# Altium PCB PCB3.PcbDoc (part 2 of 2)
Units mm, origin at the board's own origin, x right, y up, seen from the top; angles counter-clockwise.
Board outline 85.9 x 184.4 mm, 4 copper layers (Top Layer, GND, VCC, Bottom Layer), stack 1.615 mm thick; 137 components, 108 nets, 438 pads, 251 vias.
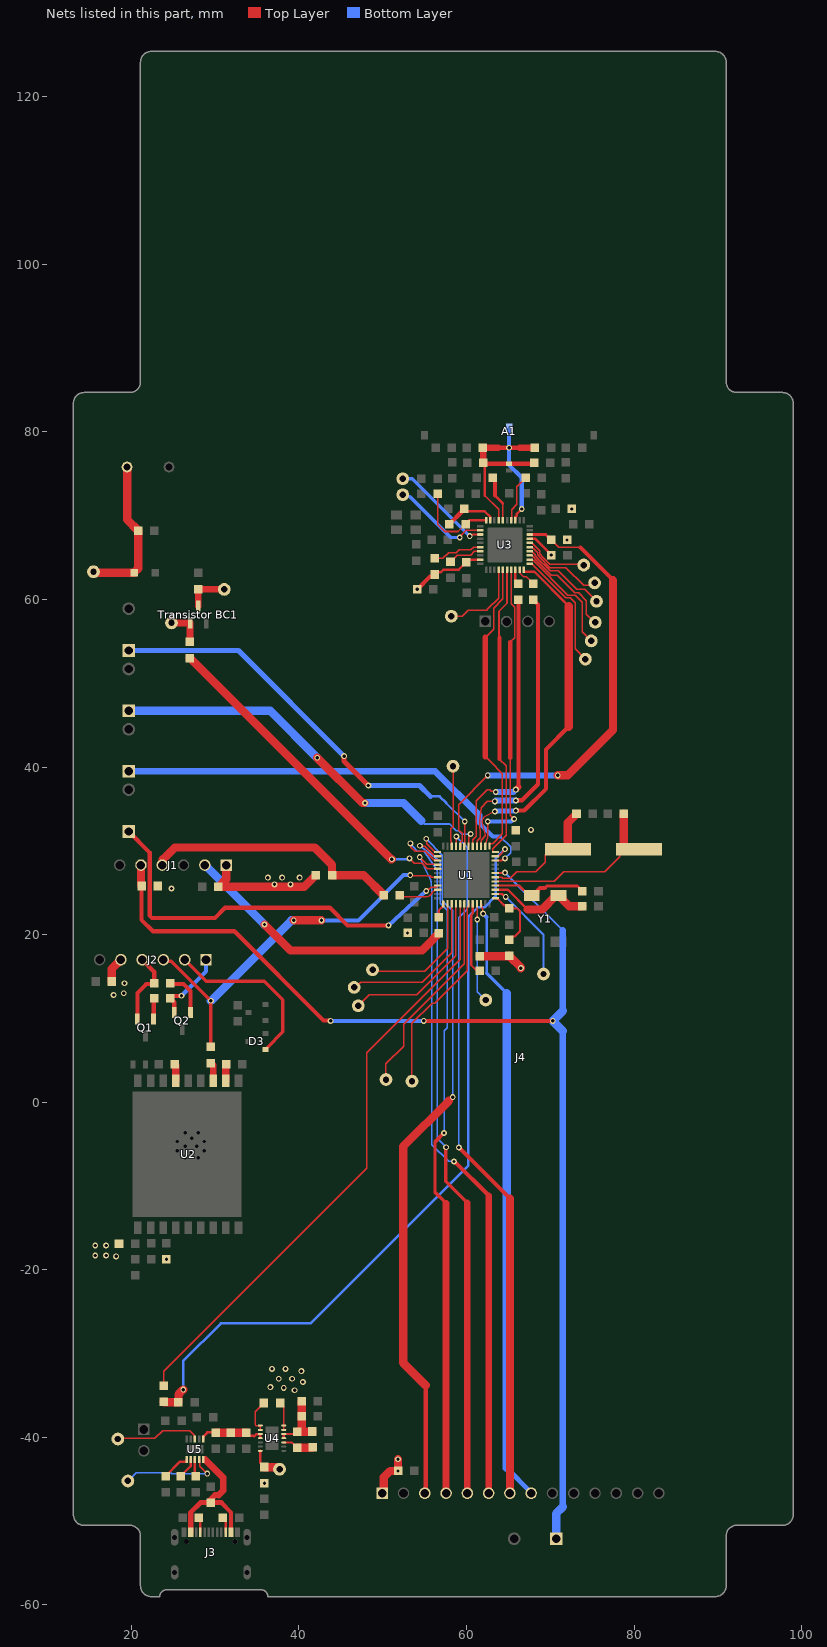
[diagram p4: the nets of this part, all layers, seen from the top]

## Via types
v1: diameter 0.7, hole 0.4, Top Layer to Bottom Layer, 186 vias
v2: diameter 0.7, hole 0.4, Top Layer to Bottom Layer, tented bottom, 64 vias
v3: diameter 0.7, hole 0.4, Top Layer to Bottom Layer, tented both sides, 1 vias

## Nets (pads, with @x,y where several pads share a name; then routed paths per layer and width w, separated by ;. In a path a pad name is that pad's centre, name@x,y a point inside that pad or via, vN(x,y) a via of type N, cw(c..) or ccw(c..) an arc to the next point about the centre after c; other vN are vias at no path point) (continued)
NetD3_1: D3.1 J2.2 | length 20.5
  Top Layer w0.4: J2.2@26.38,17 28.932,14.448 35.852,14.448 38.1,12.2 38.1,8.4 36.15,6.45 36.15,6.4 36.05,6.3 D3.1@36,6.3
NetJ1_2: J1.2 R10.2 | length 33
  Top Layer w1: v2(35.9,21.2) 39,18.1 54.693,18.1 56.028,19.435 56.028,19.466 R10.2@56.7,20.138
  Bottom Layer w1: J1.2@28.78,28.3 v2@35.89,21.19
NetJ1_4: J1.4 R8.1 R9.2 | length 30.7
  Top Layer w1: J1.4@23.7,28.3 23.771,28.371 23.771,28.971 25.2,30.4 41.9,30.4 43.962,28.338 R8.1@43.962,27.1 47.738,27.1 R9.2@50.138,24.7
NetJ2_1: J2.1 Q2.2 R15.1 | length 8.9
  Top Layer w0.5: Q2.2@25.135,10.716 25.135,11.928 R15.1@24.662,12.4 24.92,12.658 25.904,12.658 25.946,12.7 v1(26,12.7)
  Bottom Layer w0.5: v1(26,12.7) 28.92,15.62 J2.1@28.92,17
NetJ2_3: J2.3 R13.1 U1.31 | length 46.6
  Top Layer w0.15: v1(53.301,27.099) 53.4,27 55.655,27 55.805,26.85 U1.31@56.57,26.85
  Top Layer w0.4: J2.3@23.84,17 24.026,16.814 24.786,16.814 v1(29.5,12.1) R13.1@29.5,6.6
  Top Layer w1: v2(39.4,21.7) v1(42.7,21.7)
  Bottom Layer w0.5: v1(42.7,21.7) 47.1,21.7 52.499,27.099 v1(53.301,27.099)
  Bottom Layer w1: v1(29.5,12.1) 39.1,21.7 v2(39.4,21.7)
NetJ2_4: J2.4 Q1.2 R16.1 | length 9
  Top Layer w0.5: Q1.2@20.735,9.916 20.735,13.035 21.8,14.1 22.638,14.1 R16.1@22.738,14.2 22.738,15.562 J2.4@21.3,17
NetJ3_A5: J3.A5 R26.1 | length 1.8
  Top Layer w0.3: R26.1@28.062,-49.6 28.25,-49.788 J3.A5@28.25,-51.35
NetJ3_B5: J3.B5 R25.2 | length 1.9
  Top Layer w0.3: R25.2@30.938,-49.6 31.25,-49.912 J3.B5@31.25,-51.35
NetJ4_3: J4.3 U1.25 | length 85.3
  Top Layer w0.15: v1(55.2,31.438) 55.257,31.38 55.257,30.863 56.27,29.85 U1.25@56.55,29.85 U1.25@56.57,29.85 ; 57.9,0.156 58.344,0.6 v1(58.375,0.6)
  Top Layer w0.5: J4.3@55.15,-46.665 55.15,-33.8
  Top Layer w1: 55.15,-33.8 52.45,-31.1 52.45,-5.294 57.9,0.156
  Bottom Layer w0.15: v1(55.2,31.438) 57.14,29.498 57.14,24.06 58.375,22.825 v1(58.375,0.6)
NetJ4_4: J4.4 U1.26 | length 82.6
  Top Layer w0.15: v1(54.451,30.607) 54.49,30.568 55.026,30.568 56.184,29.41 56.51,29.41 U1.26@56.57,29.35
  Top Layer w0.4: v1(57.325,-3.675) 56.25,-4.75 56.25,-10.75 57.57,-12.07
  Top Layer w0.8: J4.4@57.57,-46.665 57.57,-12.07
  Bottom Layer w0.15: v1(54.451,30.607) 54.969,30.204 56.782,28.818 56.87,28.73 56.87,23.73 57.7,22.9 57.7,8.874 57.325,8.499 v1(57.325,-3.675)
NetJ4_5: J4.5 U1.27 | length 85
  Top Layer w0.15: v1(53.316,30.884) 53.372,30.828 53.372,30.428 53.875,29.925 55.075,29.925 56.09,28.91 56.51,28.91 U1.27@56.57,28.85
  Top Layer w0.4: v1(57.575,-5.375) 57.525,-5.425 57.525,-9.43 60.11,-12.015
  Top Layer w0.8: J4.5@60.11,-46.665 60.11,-12.015
  Bottom Layer w0.15: v1(53.316,30.884) 54.067,30.01 54.107,29.97 54.511,29.919 cw(c54.425,29.25) 54.513,29.919 54.945,29.863 54.997,29.81 56.5,27.7 56.5,-3.875 56.5,-4.3 v1(57.575,-5.375)
NetJ4_6: J4.6 U1.28 | length 81.9
  Top Layer w0.15: v1(54.425,29.25) 55.27,28.405 55.786,28.405 55.822,28.403 56.21,28.375 U1.28@56.57,28.35 ; v1(58.525,-7.075) v1@58.585,-7.075
  Top Layer w0.5: v1@58.585,-7.075 62.66,-11.15
  Top Layer w0.8: J4.6@62.66,-46.6 62.66,-11.15
  Bottom Layer w0.15: v1(54.425,29.25) 54.98,28.123 cw(c54.375,27.825) 54.985,28.115 55.71,26.59 cw(c55.1,26.3) 55.716,26.576 cw(c55.1,26.3) 55.775,26.302 55.872,25.263 cw(c55.2,25.2) 55.875,25.199 55.875,-5.075 57.875,-7.075 v1(58.525,-7.075)
NetJ4_7: J4.7 U1.21 | length 83
  Top Layer w0.15: U1.21@58.75,30.53 58.775,30.555 58.775,31.675 v1(58.8,31.7)
  Top Layer w0.5: v1(59.1,-5.4) 65.2,-11.5
  Top Layer w1: J4.7@65.2,-46.6 65.2,-11.5
  Bottom Layer w0.15: v1(58.8,31.7) 60.1,30.4 60.1,23 59.1,22 v1(59.1,-5.4)
NetJ4_8: J4.8 U1.46 | length 72.8
  Top Layer w0.15: U1.46@61.75,23.67 61.81,23.61 61.81,23.19 61.925,23.075 61.925,22.575 v1(62,22.5)
  Bottom Layer w0.15: v1@62,22.487 v1(62,22.5)
  Bottom Layer w0.3: 62.4,15.4 62.4,22.087
  Bottom Layer w0.4: 62.4,15.4 64.8,13
  Bottom Layer w0.5: v1@62,22.487 62.4,22.087
  Bottom Layer w0.6: 64.8,-43.66 J4.8@67.74,-46.6
  Bottom Layer w1: 64.8,-43.66 64.8,13
NetL3_1: L3.1 U4.8 U4.9 | length 4.2
  Top Layer w0.15: U4.9@35.4,-39.1 U4.8@35.4,-38.6 34.888,-38.6 34.8,-38.512 34.8,-36.938 L3.1@35.838,-35.9
NetL3_2: L3.2 U4.6 U4.7 | length 3.4
  Top Layer w0.15: L3.2@37.762,-35.9 38.195,-36.333 38.195,-37.443 38.2,-37.448 U4.7@38.2,-38.6 U4.6@38.2,-39.1
NetP1_1: P1.1 U1.38 | length 15.4
  Top Layer w0.15: P1.1@48.8,15.8 48.944,15.656 55.056,15.656 57.75,18.35 U1.38@57.75,23.67
NetP2_1: P2.1 U1.45 | length 11.9
  Top Layer w0.15: U1.45@61.25,23.67 61.275,23.645 v1@61.275,21.8
  Bottom Layer w0.15: v1(61.3,21.8) 61.3,13.2 P2.1@62.3,12.2
NetP3_1: P3.1 U1.39 | length 19.2
  Top Layer w0.15: P3.1@46.6,13.7 46.743,13.7 47.369,14.327 54.727,14.327 58.25,17.85 U1.39@58.25,23.67
NetP4_1: P4.1 U1.40 | length 20.3
  Top Layer w0.15: P4.1@47.1,11.5 48.4,12.8 54.1,12.8 58.75,17.45 U1.40@58.75,23.67
NetP5_1: P5.1 R5.1 U4.14 | length 4.1
  Top Layer w0.25: U4.14@35.4,-41.6 35.4,-43.038 R5.1@35.9,-43.538
  Top Layer w1: R5.1@35.9,-43.538 35.908,-43.546 37.304,-43.546 37.558,-43.8 P5.1@37.7,-43.8
NetP6_1: P6.1 U1.42 | length 24.8
  Top Layer w0.15: P6.1@50.4,2.7 50.4,4.6 52.5,6.7 52.5,9.3 59.75,16.55 U1.42@59.75,23.67
NetP7_1: P7.1 U1.43 | length 24.1
  Top Layer w0.15: P7.1@53.5,2.5 53.5,9.4 55.936,11.836 56.236,11.836 60.1,15.7 60.1,23.222 60.188,23.31 60.19,23.31 60.25,23.37 U1.43@60.25,23.67
NetP8_1: P8.1 U1.2 | length 12.5
  Top Layer w0.25: U1.2@63.43,24.85 64.24,24.85 64.59,24.5 v1(64.7,24.5)
  Bottom Layer w0.25: v1(64.7,24.5) 69.2,20 P8.1@69.2,15.3
NetP9_1: P9.1 U3.36 | length 7.8
  Top Layer w0.15: U3.36@67.55,66.75 67.8,66.75 67.955,66.595 67.987,66.595 68.768,65.814 68.768,65.46 68.955,65.272 68.955,65.187 69.942,64.2 73.9,64.2 P9.1@74,64.1
NetP10_1: P10.1 U3.35 | length 10
  Top Layer w0.15: U3.35@67.55,66.25 67.8,66.25 67.955,66.095 67.987,66.095 68.498,65.584 68.498,65.348 68.685,65.161 68.685,65.075 69.96,63.8 71.882,63.8 74.007,61.675 74.525,61.675 74.562,61.712 75.037,61.712 P10.1@75.3,61.975
  Bottom Layer w0.15: P10.1@75.25,61.925 P10.1@75.3,61.975
NetP11_1: P11.1 U3.33 | length 12.1
  Top Layer w0.15: U3.33@67.55,65.25 67.8,65.25 67.955,65.095 67.987,65.095 68.145,64.937 68.145,64.852 70.122,62.875 70.825,62.875 72.93,60.77 73.405,60.77 74.325,59.85 74.325,58.25 75.3,57.275 P11.1@75.375,57.275
NetP12_1: P12.1 U3.34 | length 10.6
  Top Layer w0.15: U3.34@67.55,65.75 67.8,65.75 67.955,65.595 67.987,65.595 68.228,65.354 68.228,65.236 68.415,65.049 68.415,64.964 69.979,63.4 70.95,63.4 73.15,61.2 74.1,61.2 P12.1@75.525,59.775
NetP13_1: P13.1 U3.32 | length 13.4
  Top Layer w0.15: U3.32@67.55,64.75 67.8,64.75 67.955,64.595 68.02,64.595 72.115,60.5 72.975,60.5 73.825,59.65 73.825,56.125 P13.1@74.9,55.05
NetP14_1: P14.1 U3.31 | length 14.6
  Top Layer w0.15: U3.31@67.55,64.25 67.8,64.25 71.85,60.2 72.4,60.2 72.975,59.625 72.975,54.1 P14.1@74.2,52.875
NetP15_1: P15.1 U3.24 | length 9.9
  Top Layer w0.15: P15.1@58.2,58 59.5,58 60.212,58.712 62.187,58.712 62.412,58.712 62.571,58.871 63.85,60.15
  Top Layer w0.2: 63.85,60.15 U3.24@63.85,63.55
NetP16_1: P16.1 U3.12 | length 11.8
  Top Layer w0.2: v1(59.2,67.4) 59.2,67.5 59.95,68.25 U3.12@61.65,68.25
  Bottom Layer w0.4: P16.1@52.4,72.5 52.615,72.285 53.215,72.285 58.1,67.4 v1(59.2,67.4)
NetP17_1: P17.1 U3.13 | length 12.2
  Top Layer w0.2: v1(60.4,67.55) 60.535,67.55 60.735,67.75 U3.13@61.65,67.75
  Bottom Layer w0.4: P17.1@52.4,74.4 53.55,74.4 v1(60.4,67.55)
NetP18_1: P18.1 U5.9 | length 12
  Top Layer w0.15: U5.9@28.1,-42.625 28.175,-42.7 28.175,-43.421 v1(29.077,-44.323)
  Bottom Layer w0.15: P18.1@19.6,-45.2 20.6,-44.2 24.703,-44.2 24.826,-44.323 v1(29.077,-44.323)
NetP19_1: P19.1 U5.3 | length 10.2
  Top Layer w0.15: P19.1@18.4,-40.2 18.487,-40.113 22.818,-40.113 23.73,-39.2 27,-39.2 27.525,-39.725 27.525,-40.1 U5.3@27.6,-40.175
NetP20_1: P20.1 U1.22 | length 9.7
  Top Layer w0.15: U1.22@58.25,30.53 58.19,30.59 58.19,31.155 58.125,31.22 58.125,32.62 58.4,32.895 P20.1@58.4,40.1
NetQ1_1: Q1.1 R15.2 | length 2.5
  Top Layer w0.5: Q1.1@22.665,9.916 22.695,9.945 22.695,12.357 R15.2@22.738,12.4
NetQ2_1: Q2.1 R16.2 | length 5.3
  Top Layer w0.5: R16.2@24.662,14.2 24.762,14.1 26.23,14.1 27.065,13.265 Q2.1@27.065,10.716
NetR3_2: R3.2 U1.44 | length 8.7
  Top Layer w0.25: U1.44@60.75,23.67 60.75,22.517 60.575,22.342 60.575,16.363 61.238,15.7 R3.2@61.6,15.7
NetR6_1: R6.1 R7.2 U1.11 | length 92.2
  Top Layer w0.15: U1.11@63.43,29.35 63.49,29.41 63.91,29.41 64.6,30.1 v1(64.6,30.2)
  Top Layer w1: R7.2@23.9,-35.762 23.938,-35.8 R6.1@25.638,-35.8 25.646,-35.792 25.646,-34.854 v1(26.2,-34.3)
  Bottom Layer w0.3: v1(26.2,-34.3) 26.2,-30.9 30.7,-26.4 41.4,-26.4 60.2,-7.6 60.2,22.1 61.35,23.25 62.15,23.25 63.495,24.595 63.495,29.095 v1(64.6,30.2)
NetR7_1: R7.1 U1.41 | length 72.2
  Top Layer w0.15: R7.1@23.9,-33.838 23.9,-32.1 48.1,-7.9 48.1,5.9 59.25,17.05 U1.41@59.25,23.67
NetR9_1: R9.1 U1.34 | length 4.9
  Top Layer w0.15: R9.1@52.062,24.7 52.495,24.541 54.389,24.541 55.207,24.525 55.209,24.525 ccw(c55.221,25.212) 55.759,24.784 55.94,25.012 55.94,25.046 56.074,25.18 56.21,25.29 U1.34@56.57,25.35
NetR10_1: R10.1 U1.37 | length 1.9
  Top Layer w0.25: R10.1@56.7,22.062 56.7,22.9 57.16,23.36 57.24,23.36 57.25,23.37 U1.37@57.25,23.67
NetR13_2: R13.2 U2.12 | length 2.3
  Top Layer w0.8: R13.2@29.5,4.675 29.8,4.375 U2.12@29.8,2.54
NetR14_2: R14.2 U2.11 | length 2
  Top Layer w0.9: U2.11@31.3,2.54 31.3,4.462 R14.2@31.338,4.5
NetR21_1: R21.1 U1.20 U3.38 | length 57.4
  Top Layer w0.15: U1.20@59.25,30.53 59.31,30.59 59.31,31.055 59.475,31.22 59.475,32.07 59.1,32.445 59.1,35.438 59.1,35.5 v1(62.547,39) ; R21.1@70.1,67.1 71,66.2 73.6,66.2
  Top Layer w0.3: U3.38@67.55,67.75 69.45,67.75 R21.1@70.1,67.1
  Top Layer w0.5: 73.6,66.2 77.5,62.3
  Top Layer w1: v1(70.9,39) 72.087,39 77.5,44.413 77.5,62.3
  Bottom Layer w0.7: v1(62.547,39) v1(70.9,39)
NetR23_1: R23.1 U3.29 | length 2.6
  Top Layer w0.2: U3.29@66.35,63.55 66.35,63.162 66.821,62.691 67.171,62.691 R23.1@68,61.862
NetR23_2: R23.2 U1.16 | length 35
  Top Layer w0.15: U1.16@61.25,30.53 61.31,30.59 61.31,31.21 61.656,31.556 61.656,31.68 61.573,33.454 cw(c62.547,33.5) 61.578,33.605 61.744,35.144 62.5,35.9 v1(63.4,35.9)
  Top Layer w0.5: v1(65.9,36) 65.938,36.038 66.638,36.038 68.55,37.95 68.55,59.388 R23.2@68,59.938
  Bottom Layer w0.7: v1(63.4,35.9) 63.5,36 v1(65.9,36)
NetR24_1: R24.1 U3.28 | length 1.8
  Top Layer w0.3: U3.28@65.85,63.55 65.85,62.212 R24.1@66.2,61.862
NetR24_2: R24.2 U1.17 | length 33.9
  Top Layer w0.15: U1.17@60.75,30.53 60.75,31.295 61.2,31.745 61.2,36 62.5,37.3 62.778,37.3 62.951,37.127 63.4,37.127 v1(63.505,37.022)
  Top Layer w0.5: 66.2,37.6 R24.2@66.2,59.938
  Top Layer w0.7: v1(65.9,37.3) 66.2,37.6
  Bottom Layer w0.7: v1(63.505,37.022) 65.622,37.022 v1(65.9,37.3)
NetR27_1: R27.1 R28.2 U4.3 | length 3.7
  Top Layer w0.25: U4.3@38.2,-40.6 39.138,-40.6 R28.2@39.8,-41.262
  Top Layer w1: R28.2@39.8,-41.262 41.575,-41.262 R27.1@41.638,-41.2
NetR29_1: R29.1 U5.8 | length 2.1
  Top Layer w0.3: U5.8@27.6,-42.625 27.6,-44.538 R29.1@27.7,-44.638
NetR30_1: R30.1 U5.7 | length 2.5
  Top Layer w0.3: R30.1@25.9,-44.638 27.1,-43.438 U5.7@27.1,-42.625
NetR31_2: R31.2 U5.6 | length 3.5
  Top Layer w0.3: R31.2@24.1,-44.638 25.838,-42.9 26.6,-42.9 U5.6@26.6,-42.625
NetR33_1: "Transistor BC1.3" R33.1 TP2.1 | length 5.1
  Top Layer w0.8: 28,59.216 R33.1@28,61.238 28.019,61.219 31.081,61.219 TP2.1@31.1,61.2
NetR34_1: R34.1 U1.29 | length 40.1
  Top Layer w0.15: v1(53.2,29.1) 53.8,28.5 54.7,28.5 55.35,27.85 U1.29@56.57,27.85
  Top Layer w1: R34.1@27,53 51,29 v1(51.1,29)
  Bottom Layer w0.3: v1(51.1,29) 52.992,29 53.092,29.1 v1(53.2,29.1)
NetR34_2: "Transistor BC1.1" R34.2 TP3.1 | length 4.5
  Top Layer w0.8: TP3.1@24.8,57.2 24.808,57.192 27.027,57.192 27.035,57.184 27.017,57.167 27.017,54.942 R34.2@27,54.925
NetR35_2: R35.2 U2.15 | length 2
  Top Layer w0.9: R35.2@25.2,4.5 25.3,4.4 U2.15@25.3,2.54
NetR36_2: R36.2 U3.16 | length 6
  Top Layer w0.15: R36.2@56.2,64.9 57.173,64.9 57.863,65.59 58.808,65.59 59.118,65.9 60.5,65.9 60.85,66.25 U3.16@61.65,66.25
NetR37_2: R37.2 U3.17 | length 4.1
  Top Layer w0.15: R37.2@58.1,64.5 58.9,65.3 60.5,65.3 60.95,65.75 U3.17@61.65,65.75
NetS2_1: S2.1 U1.33 | length 48.8
  Top Layer w0.15: v1(55.2,25.2) 55.78,25.68 56.456,25.68 56.518,25.742 56.541,25.79 U1.33@56.57,25.85
  Top Layer w0.5: S2.1@19.7,32.3 22.2,29.8 22.2,28.752 22.215,28.737 22.215,27.863 22.2,27.848 22.2,22.293 22.493,22 30,22 31.2,23.2 43.7,23.2 45.8,21.1 v1(50.7,21.1)
  Bottom Layer w0.5: v1(50.7,21.1) v1(55.2,25.2)
NetS3_1: S3.1 U1.10 | length 52.8
  Top Layer w0.25: U1.10@63.43,28.85 63.44,28.86 64.238,28.86 64.478,29.1 v1(64.6,29.1)
  Bottom Layer w0.15: 64,31.7 64.055,31.7 65.275,30.48 65.275,29.775 v1(64.6,29.1)
  Bottom Layer w0.5: 61.5,33.5 61.5,33.345 63.145,31.7 64,31.7
  Bottom Layer w0.8: S3.1@19.7,39.5 56.255,39.5 61.5,34.255 61.5,33.5
NetS4_1: S4.1 U1.18 | length 48.4
  Top Layer w0.15: U1.18@60.25,30.53 60.25,31.601 60.5,31.851 v1(60.5,32)
  Top Layer w1: v1(42.2,41.1) 47.6,35.7 v1@47.8,35.7
  Bottom Layer w0.15: 58.8,32.4 59.1,32.4 59.5,32 v1(60.5,32)
  Bottom Layer w0.2: 54.6,33.6 55,33.2 58,33.2 58.8,32.4
  Bottom Layer w1: S4.1@19.7,46.7 36.6,46.7 v1(42.2,41.1) ; v1(47.9,35.7) 52.5,35.7 54.6,33.6
NetS5_1: S5.1 U1.19 | length 51.9
  Top Layer w0.15: U1.19@59.75,30.53 59.775,30.555 59.775,33.475 v1(59.8,33.5)
  Top Layer w0.6: v1(45.4,41.3) 45.4,40.7 v1(48.3,37.8)
  Bottom Layer w0.15: 57.6,35.7 v1(59.8,33.5)
  Bottom Layer w0.3: 55.7,36.5 56.8,36.5 57.6,35.7
  Bottom Layer w0.6: S5.1@19.7,53.9 32.8,53.9 v1(45.4,41.3) ; v1(48.3,37.8) 54.4,37.8 55.7,36.5
NetU1_12: U1.12 U3.26 | length 35.4
  Top Layer w0.15: U1.12@63.43,29.85 63.218,29.85 63.158,29.91 63.158,30.122 63.142,30.138 63.142,30.262 63.84,30.96 64.757,31.877 64.757,37.686 64.757,40.129 63.93,40.956
  Top Layer w0.2: 63.93,55.43 63.885,55.475 63.885,58.585 64.85,59.55 U3.26@64.85,63.55
  Top Layer w0.5: 63.93,40.956 63.93,55.43
NetU1_13: U1.13 U3.25 | length 35.6
  Top Layer w0.15: 62.25,41.275 62.901,40.624 64.3,39.225 64.3,32.022 63.134,30.856 62.81,30.856 62.75,30.796 U1.13@62.75,30.53 ; 62.25,55.45 63.239,56.439 63.239,58.946 64.35,60.057
  Top Layer w0.2: 64.35,60.057 U3.25@64.35,63.55
  Top Layer w0.7: 62.25,41.275 62.25,55.45
NetU1_14: U1.14 U3.27 | length 36.6
  Top Layer w0.15: U1.14@62.25,30.53 62.31,30.89 62.526,31.662 v1(62.547,33.5) ; 65.225,41.075 65.225,34.244 65.669,33.8 v1(65.7,33.8) ; 65.225,54.925 65.755,55.455 65.755,59.091 65.35,59.496 U3.27@65.35,63.55
  Top Layer w0.5: 65.225,41.075 65.225,54.925
  Bottom Layer w0.5: v1(62.547,33.5) 65.346,33.5 65.646,33.8 v1(65.7,33.8)
NetU1_15: U1.15 U3.30 | length 42.7
  Top Layer w0.15: U1.15@61.75,30.53 61.81,30.59 61.75,30.65 61.75,31.268 62.256,31.774 62.256,31.898 61.893,33.334 cw(c62.547,33.5) 62.237,34.1 v1(63.4,34.7) ; U3.30@66.85,63.55 66.85,63.375 U3.30@66.925,63.3
  Top Layer w0.3: U3.30@66.925,63.3 68.1,63.3 72.2,59.2
  Top Layer w0.5: v1(65.9,34.8) 66.904,34.8 69.5,37.396 69.5,42.1 72.2,44.8
  Top Layer w1: 72.2,44.8 72.2,59.2
  Bottom Layer w0.15: v1(63.4,34.7) v1@63.45,34.75 ; v1@65.85,34.75 v1(65.9,34.8)
  Bottom Layer w0.6: v1@63.45,34.75 v1@65.85,34.75
NRST: J1.5 R32.1 S1.1 U1.7 | length 145.5
  Top Layer w0.25: U1.7@63.43,27.35 63.44,27.36 64.56,27.36 v1(64.6,27.4)
  Top Layer w0.5: R32.1@21.238,25.8 21.238,21.762 22.6,20.4 32.3,20.4 42.962,9.738 43.762,9.738 v1(43.8,9.7) ; v1(54.9,9.7) v1(70.3,9.7)
  Top Layer w1: J1.5@21.16,28.3 21.16,25.878 R32.1@21.238,25.8
  Bottom Layer w0.25: v1(64.6,27.4) 71.5,20.5
  Bottom Layer w0.5: v1(43.8,9.7) v1(54.9,9.7)
  Bottom Layer w0.8: 71.5,-48.298 71.5,8.5 ; 71.5,10.9 71.5,20.5
  Bottom Layer w1: S1.1@70.7,-52.1 70.7,-49.098 71.5,-48.298 ; 71.5,8.5 v1(70.3,9.7) 71.5,10.9
PC14-OSC32_IN: C1.2 U1.3 Y1.1 | length 12.8
  Top Layer w0.15: Y1.1@70.7,24.65 Y1.1@71,24.65
  Top Layer w0.25: U1.3@63.43,25.35 64.95,25.35
  Top Layer w0.3: 64.95,25.35 67.3,23
  Top Layer w1: 67.3,23 69.05,23 Y1.1@70.7,24.65 ; Y1.1@71,24.65 71.3,24.65 71.45,24.5 71.45,24.2 72.254,23.396 C1.2@73.838,23.396
PC15-OSC32_OUT: C2.2 U1.4 Y1.4 | length 11.8
  Top Layer w0.15: Y1.4@67.5,24.65 Y1.4@67.8,24.65
  Top Layer w0.25: U1.4@63.43,25.85 66.3,25.85
  Top Layer w0.3: 66.3,25.85 Y1.4@67.5,24.65 ; 69.35,25.55 69.6,25.8 73.234,25.8 C2.2@73.838,25.196
  Top Layer w0.5: Y1.4@67.8,24.65 68.1,24.65 68.5,25.05 68.5,25.257 68.793,25.55 69.35,25.55
PH0-OSC_IN: C8.2 U1.5 Y2.1 | length 23.2
  Top Layer w0.15: U1.5@63.43,26.35 70.47,26.35 71.62,27.5 76.5,27.5 78.313,29.313 78.313,29.525 78.988,30.2 Y2.1@79.012,30.2
  Top Layer w1: C8.2@78.762,34.404 78.762,30.45 79.012,30.2 Y2.1@80.6,30.2
PH1-OSC_OUT: C9.2 U1.6 Y2.2 | length 15.3
  Top Layer w0.15: U1.6@63.43,26.85 64.195,26.85 64.32,26.725 65.225,26.725 66,27.5 68.3,27.5 69.425,28.625 69.425,29.525 70.1,30.2 Y2.2@72.1,30.2
  Top Layer w1: Y2.2@72.1,30.2 72.1,33.359 C9.2@73.138,34.396
RX: C15.1 R17.2 U3.10 | length 10.4
  Top Layer w0.2: C15.1@56.562,72.596 56.562,68.938 57.4,68.1 59,68.1 R17.2@59.9,69
  Top Layer w0.3: R17.2@59.9,69 60.35,69.45 U3.10@62.35,69.45
TVSS: ?.1 A1.2 C21.1 C22.1 C23.2 C24.2 U3.3 U3.7 | length 33.6
  Top Layer w0.2: 62.2,72.4 63.85,70.75 U3.7@63.85,69.45
  Top Layer w0.3: C23.2@61.994,76.331 C23.2@62.025,76.3 62.125,76.2 62.2,76.125 62.2,72.4 ; U3.3@65.85,69.45 65.85,69.85 66.028,70.028 66.028,70.228 v1(66.6,70.8) ; C21.1@67.972,76.2 C21.1@68.075,76.304
  Top Layer w0.5: C23.2@62.125,76.2 ?.1@65.1,76.2 C21.1@67.972,76.2 ; 63.804,78.104 66.396,78.104
  Top Layer w0.8: C23.2@61.994,76.331 61.994,78.072 C24.2@61.962,78.104 63.804,78.104 ; 66.396,78.104 C22.1@68.175,78.104
  Bottom Layer w0.5: A1.2@65.2,80.425 65.1,80.325 65.1,79.4 65.1,76.05 66.6,74.55 v1(66.6,70.8)
  other v1: 65.1,78.104
TX1: L1.1 U3.4 | length 5.8
  Top Layer w0.15: U3.4@65.35,69.45 65.4,69.5 65.4,70.7 66.034,71.334 66.034,73.458 L1.1@67.075,74.5
TX2: L2.1 U3.6 | length 5.5
  Top Layer w0.15: U3.6@64.35,69.45 64.35,71.45
  Top Layer w0.3: 63.4,72.4 64.35,71.45
  Top Layer w0.5: L2.1@63.162,74.5 63.4,74.262 63.4,72.4
VBAT: C11.2 R40.1 U1.1 | length 7.8
  Top Layer w0.25: U1.1@63.43,24.35 63.73,24.35 63.74,24.34 63.74,24.26 64.492,23.508 64.717,23.508 C11.2@65.1,23.125 66.075,23.125 66.4,22.8 66.4,20.4 65.773,19.773 65.473,19.773 R40.1@65.1,19.4
VBUS: C36.2 J3.A4_B9 J3.B4_A9 U5.10 | length 17.6
  Top Layer w0.3: C36.2@29.5,-47.8 C36.2@29.828,-47.472
  Top Layer w0.5: 30.748,-47.8 31.9,-48.952 J3.B4_A9@31.9,-51.35
  Top Layer w0.6: J3.A4_B9@27.1,-51.35 27.1,-48.952 28.252,-47.8 C36.2@29.5,-47.8 30.748,-47.8
  Top Layer w0.7: C36.2@29.452,-47.452 30.004,-46.9 30.444,-46.9
  Top Layer w0.8: 28.819,-42.65 30.968,-44.8 30.968,-46.376 30.444,-46.9
VCC: BZ1.1 C7.2 C10.2 C14.2 C17.2 C29.2 C34.2 C37.2 C39.2 C40.2 C41.2 J1.1 J2.5 J4.1 L4.2 R1.2 R5.2 R8.2 R11.2 R12.2 R19.2 R21.2 R28.1 R32.2 R36.1 R38.2 R39.2 R40.2 TP1.1 U3.19 U3.37 U4.4 U4.5 | length 66.5
  Top Layer w0.25: U4.4@38.2,-40.1 U4.5@38.2,-39.6 R28.1@39.538,-39.6
  Top Layer w0.3: R36.1@56.2,62.975 56.489,63.264 56.964,63.264 57.24,63.54 59.074,63.54 C39.2@59.996,64.462 60.284,64.75 U3.19@61.65,64.75 ; U3.37@67.55,67.25 68.184,67.25 v2(70.138,65.296)
  Top Layer w0.5: v2(54.138,61.196) 55.658,62.717 55.942,62.717 R36.1@56.2,62.975
  Top Layer w1: TP1.1@15.5,63.3 15.6,63.2 L4.2@20.35,63.2 20.838,63.688 C37.2@20.838,68.196 19.5,69.534 BZ1.1@19.5,75.8 ; C14.2@17.662,14.404 17.662,15.902 J2.5@18.76,17 ; J1.1@31.32,28.3 31.32,26.62 C10.2@30.4,25.7 40.638,25.7 R8.2@42.038,27.1 ; R28.1@39.8,-39.338 41.562,-39.338 C34.2@41.6,-39.3 ; 40.33,-38.808 40.33,-37.512 C41.2@40.338,-37.504 C40.2@40.338,-35.704 ; J4.1@49.96,-46.6 50.145,-46.415 50.145,-44.755 50.888,-44.012 v2(51.83,-44.012) ; v1(51.83,-42.605) v2(51.83,-44.012) ; C7.2@51.838,-44.004 v2(51.83,-44.012) ; R39.2@61.6,17.438 65.062,17.438 R40.2@65.1,17.475 66.5,16.075 v1(66.5,16)
  other v1: 39.5,-34.38 38.2,-34.1 36.6,-34 40.48,-33.4 37.6,-33 39.2,-33 40.3,-32.1 36.8,-31.82 38.4,-31.82 18.2,-18.4 15.7,-18.3 17,-18.3 15.7,-17.1 17,-17.1 17.9,12.8 19.1,13 19.2,14.2 24.8,25.5 37.1,26 39,26 36.3,26.8 38,26.8 40.1,26.8 67.7,32.5
  other v2: 35.9,-45.462 24.2,-18.762 52.975,20.2 72,67.1 72.562,70.8
VMID: C16.2 R17.1 U3.9 | length 6.4
  Top Layer w0.3: C16.2@59.766,70.8 60.066,70.5 62.188,70.5 62.85,69.838 U3.9@62.85,69.45
  Top Layer w0.5: R17.1@57.975,69 59.504,70.529 59.504,70.546 C16.2@59.762,70.804
VSYS: C33.2 C35.2 C38.2 U4.10 U4.11 U5.1 | length 8
  Top Layer w0.25: U4.11@35.4,-40.1 U4.10@35.4,-39.6
  Top Layer w0.3: U5.1@28.6,-40.175 28.6,-39.9 29.1,-39.4 30.059,-39.4 C35.2@30.096,-39.438 ; C33.2@33.696,-39.438 34.054,-39.796 34.646,-39.796 34.7,-39.85 34.92,-39.63 U4.10@35.37,-39.63
  Top Layer w1: C35.2@30.096,-39.438 C38.2@31.896,-39.438 C33.2@33.696,-39.438
pads on no net: D2.2 D3.2 J1.6 J3. J3.A6 J3.A7 J3.A8 J3.B6 J3.B7 J3.B8 J3.S1 J3.S2 J3.S3 J3.S4 J4.9 J4.10 J4.11 J4.12 J4.13 J4.14 J4.15 J4.16 J4.17 J4.18 U2.3 U2.4 U2.5 U2.6 U2.7 U2.10 U2.13 U2.14 U2.16 U2.17 U2.18 U3.2 Y1.2 Y1.3
copper on no net:
  other v1: 65.1,82.8 67.2,120.5 64.3,123.5

## Polygon pours and split planes (outlines as drawn)
GND on GND "GND_L02_P011" (solid, pour order 11): 13.1,-49.23 ccw(c14.37,-49.23) 14.37,-50.5 19.83,-50.5 cw(c19.83,-51.77) 21.1,-51.77 21.1,-57.73 ccw(c22.37,-57.73) 22.37,-59 23.4,-59 cw(c24.2,-59) 24.2,-58.2 35.5,-58.2 cw(c35.5,-59) 36.3,-59 89.73,-59 ccw(c89.73,-57.73) 91,-57.73 91,-51.77 cw(c92.27,-51.77) 92.27,-50.5 97.73,-50.5 ccw(c97.73,-49.23) 99,-49.23 99,83.43 ccw(c97.73,83.43) 97.73,84.7 92.27,84.7 cw(c92.27,85.97) 91,85.97 91,124.13 ccw(c89.73,124.13) 89.73,125.4 83.996,125.4 25,125.4 22.37,125.4 ccw(c22.37,124.13) 21.1,124.13 21.1,123 21.1,85.97 cw(c19.83,85.97) 19.83,84.7 14.37,84.7 ccw(c14.37,83.43) 13.1,83.43
VCC on VCC "VCC_L03_P012" (solid, pour order 12): 13.1,-49.23 ccw(c14.37,-49.23) 14.37,-50.5 19.83,-50.5 cw(c19.83,-51.77) 21.1,-51.77 21.1,-57.73 ccw(c22.37,-57.73) 22.37,-59 23.4,-59 cw(c24.2,-59) 24.2,-58.2 35.5,-58.2 cw(c35.5,-59) 36.3,-59 89.73,-59 ccw(c89.73,-57.73) 91,-57.73 91,-51.77 cw(c92.27,-51.77) 92.27,-50.5 97.73,-50.5 ccw(c97.73,-49.23) 99,-49.23 99,83.43 ccw(c97.73,83.43) 97.73,84.7 92.27,84.7 cw(c92.27,85.97) 91,85.97 91,124.13 ccw(c89.73,124.13) 89.73,125.4 83.996,125.4 25,125.4 22.37,125.4 ccw(c22.37,124.13) 21.1,124.13 21.1,123 21.1,85.97 cw(c19.83,85.97) 19.83,84.7 14.37,84.7 ccw(c14.37,83.43) 13.1,83.43

## Other copper
Top Layer:
  rectangle net GND: 52.75,-53.175 63.075,-49.525
  rectangle net VSYS: 28.5,-39.9 30.2,-38.3
  rectangle net VSYS: 28.6,-39.438 30.996,-38.3
  rectangle net GND: 75.2,22.8 80.8,25.7
  rectangle net GND: 74.5,33.9 77.3,39
  rectangle net GND: 67.4,28.3 68.4,31
  rectangle net VCC: 65.5,32 68.6,33
  rectangle net GND: 26.5,22.5 28.8,26
  rectangle net VCC: 22.8,24.4 25.5,26.2
  rectangle net GND: 30.4,55.5 34.1,58.5
  rectangle net GND: 31.6,11 33.2,12.9
  rectangle net GND: 16.8,5.7 17.7,6.9
  rectangle net GND: 17.5,4.9 18.6,6.8
  rectangle net GND: 15.8,6.5 18.6,10.9
  rectangle net GND: 14.9,-24.5 20.9,-20.3
  rectangle net VCC: 14.9,-19.3 18.9,-16.4
  rectangle net NetC32_2: 38.8,-45.3 39.5,-42.8
  rectangle net GND: 44,-41.7 51.3,-35.1
  rectangle net GND: 22.6,-42.2 25.8,-41.6
  rectangle net GND: 22.4,-41.5 27.313,-40.438
  rectangle net GND: 32.4,-49.3 33.686,-44.9
  region net GND: 38,-49.7 46.1,-41.6 51.3,-41.6
  region net NetR27_1: 39.4,-41.4 39.1,-41.4 38.4,-40.7 38.5,-40.6 40.4,-40.6 40.5,-40.8
  region net VSYS: 33.1,-38.1 33.84,-38.1 35.148,-39.628 35.26,-39.74 33.999,-39.74
  region net VSYS: 28.7,-40.6 29.2,-40.6 29.9,-39.9 29.438,-39.438 28.6,-39.438
  region net VCC: 34.4,26.1 35.8,27.5 41.9,27.5 41.9,27 40.8,25.9
  region net VCC: 37,25.6 40,25.6 41.9,27.5
  region net VCC: 17.2,13.9 17.2,11.7 19.6,11.7 19.93,14.9 18.1,14.9
  region net GND: 20.9,-24.5 20.8,-24.4 20.8,-20.9 22.1,-20.9 22.9,-20.1
  region net NetC32_2: 35.4,-47.8 35.4,-47.7 35.2,-47.5
  region net NetC32_2: 35.6,-47.8 35.6,-47 35.05,-46.45 34.4,-47.1 34.4,-47.3
  region net NetC32_2: 35.4,-47.8 34.4,-47.3 34.4,-43.87
  region net NetC32_2: 35.4,-47.8 35.4,-47 34.4,-46 34.4,-45.8 34.6,-46 35.5,-46.9
  region net NetC32_2: 34.7,-46.1 34.7,-42.3 34.4,-42.6 34.4,-46
  region net NetC32_2: 37.9,-45.9 38.2,-45.9 39.1,-45 38.9,-44.8 38.9,-44.3
  region net NetC32_2: 37.5,-47.3 37,-47.8 36.3,-47.8 36.3,-47.35 36.4,-47.25 36.4,-46.8 37,-46.8 38.8,-45 38.8,-44.6
  region net NetC32_2: 39.5,-42.8 38.8,-42.8 38.8,-44.6 39.5,-45.3
  region net NetC32_2: 39.5,-42.8 38.8,-42.8 38.2,-42.2
  region net NetC32_2: 39.5,-45.3 37.5,-47.3 36.8,-47.3 39.1,-45 39.3,-45
  region net NetR27_1: 39.4,-41.7 39.4,-42.1 40.2,-42.9 41.4,-42.9 42.1,-42.2 42.1,-41.6
  region net GND: 43.9,-43.9 43.9,-41.7 44.2,-41.4 44.3,-41.5 46.4,-41.5
  region net GND: 42.7,-35.3 42.9,-35.1 44.4,-35.1 44.1,-35.4 44.1,-38.8 44,-38.8 42.6,-37.4
  region net VCC: 40.8,-35.7 39,-34.9 36.3,-34.15 36.3,-31.5 40.8,-31.5
  region net VCC: 40.338,-37.504 40.338,-39.238 40.4,-39.3 41.6,-39.3
  region net VCC: 39.3,-38.9 39.3,-39.55 39.25,-39.6 38.2,-39.6
  region net VCC: 38.2,-40.1 39.5,-39.8 39.3,-39.8 39.3,-39.6 39.2,-39.6 39.4,-39.8 39.4,-39.738 39.538,-39.6 38.2,-39.6
  region net VSYS: 30.096,-39.438 33.696,-39.438 33.696,-38.696 33.1,-38.1 30.9,-38.1
  region net VSYS: 34.7,-39.6 34.81,-39.71 34.81,-39.74 33.999,-39.74 33.696,-39.438
  region net VSYS: 34.2,-39.5 35.015,-39.5 35.132,-39.617 33.875,-39.617 34.054,-39.796
  region net NetL3_2: 38.2,-39.1 39.4,-37.9 39.4,-35.4 37.6,-35.4 37.5,-35.5 37.9,-35.9 37.9,-39.1
  region net NetL3_1: 35.2,-37.8 35.9,-37.1 35.9,-36.2 35.4,-35.7
  region net NetL3_1: 35.9,-37.1 35.9,-36.3 35.1,-37.1 35.1,-36.638 35.838,-35.9
  region net NetL3_1: 35.4,-38.6 35.4,-37.6 35.9,-37.1 35.9,-35.5 35.3,-35.5 35.2,-35.6 35.9,-36.3 35.9,-37.4
  region net NetL3_1: 34.7,-38.6 33.6,-37.5 33.6,-35.4 35.338,-35.4 35.838,-35.9 35.4,-36.338 35.4,-38.6
  region net GND: 37.39,-41.525 36.21,-41.525 36.2,-41.535 36.2,-42.6 37.401,-42.6
  region net GND: 36.21,-38.675 37.39,-38.675 37.5,-38.565 37.5,-37 36.2,-37
  region net NetL3_1: 35.4,-39.1 35,-39.1 34.7,-38.6 34.8,-38.6 35.4,-38.6
  region net VSYS: 35.4,-40.1 33.8,-39.9 34.7,-39.6 35.4,-39.6
  region net NetC32_2: 35.4,-40.6 34.8,-40.6 34.6,-40.8 34.6,-41.5 35,-41.1 35.4,-41.1
  region net GND: 33.696,-41.362 34.1,-41.37 33.686,-45 32.434,-45 30.088,-42.188 30.088,-41.37
Multi-Layer:
  pour cut-out: 24.475,-50.55 34.5,-50.55 34.5,-58.925 24.5,-58.925
  pour cut-out: 19.83,84.7 40.2,84.7 45.4,79.5 88.351,79.5 92.27,84.7 95.611,128.5 18.743,128.5

## Silkscreen, mask and mechanical layers (free items; w line width, h text height)
Top Overlay:
  circle w0.1: c64.375,112.775 r0.917
  circle w0.1: c64.45,116.35 r1.353
  lines w0.1: 48.425,-48.125 84.475,-48.125 84.475,-45.075 48.425,-45.075 48.425,-48.125 ; 60.725,55.85 71.375,55.85 71.375,58.9 60.725,58.9 60.725,55.85 ; 65.15,113.75 ccw(c65.375,113.75) 65.375,113.525 65.575,113.525 68.225,113.525 68.5,113.525 70.025,113.525 ccw(c70.025,114) 70.5,114 70.5,114.275 70.5,114.75 ccw(c70.15,114.75) 70.15,115.1 69.65,115.1 68.462,115.1 68.2,115.1 65.461,115.1 ccw(c65.461,114.789) 65.15,114.789 65.15,113.75
  text "K. Dobosz" at 66.125,116 h0.4
  text "Nie" at 64.925,115.225 h0.7 r90
  text "M. Mazurkiewicz" at 60.125,114 h0.4
  text "dziel" at 65.375,113.75 h0.7
  text "ni" at 63.925,113.5 h0.7 r270
  text "M. Stankiewicz" at 65.65,111.9 h0.4

## Text inside footprints (layer, text, board x,y; h text height)
J3: Mechanical 13 "PCB EDGE" at 34.7,-58 h0.2